# EAGLE board Line sensors - 4 (panel) (EAGLE 9.5.2)
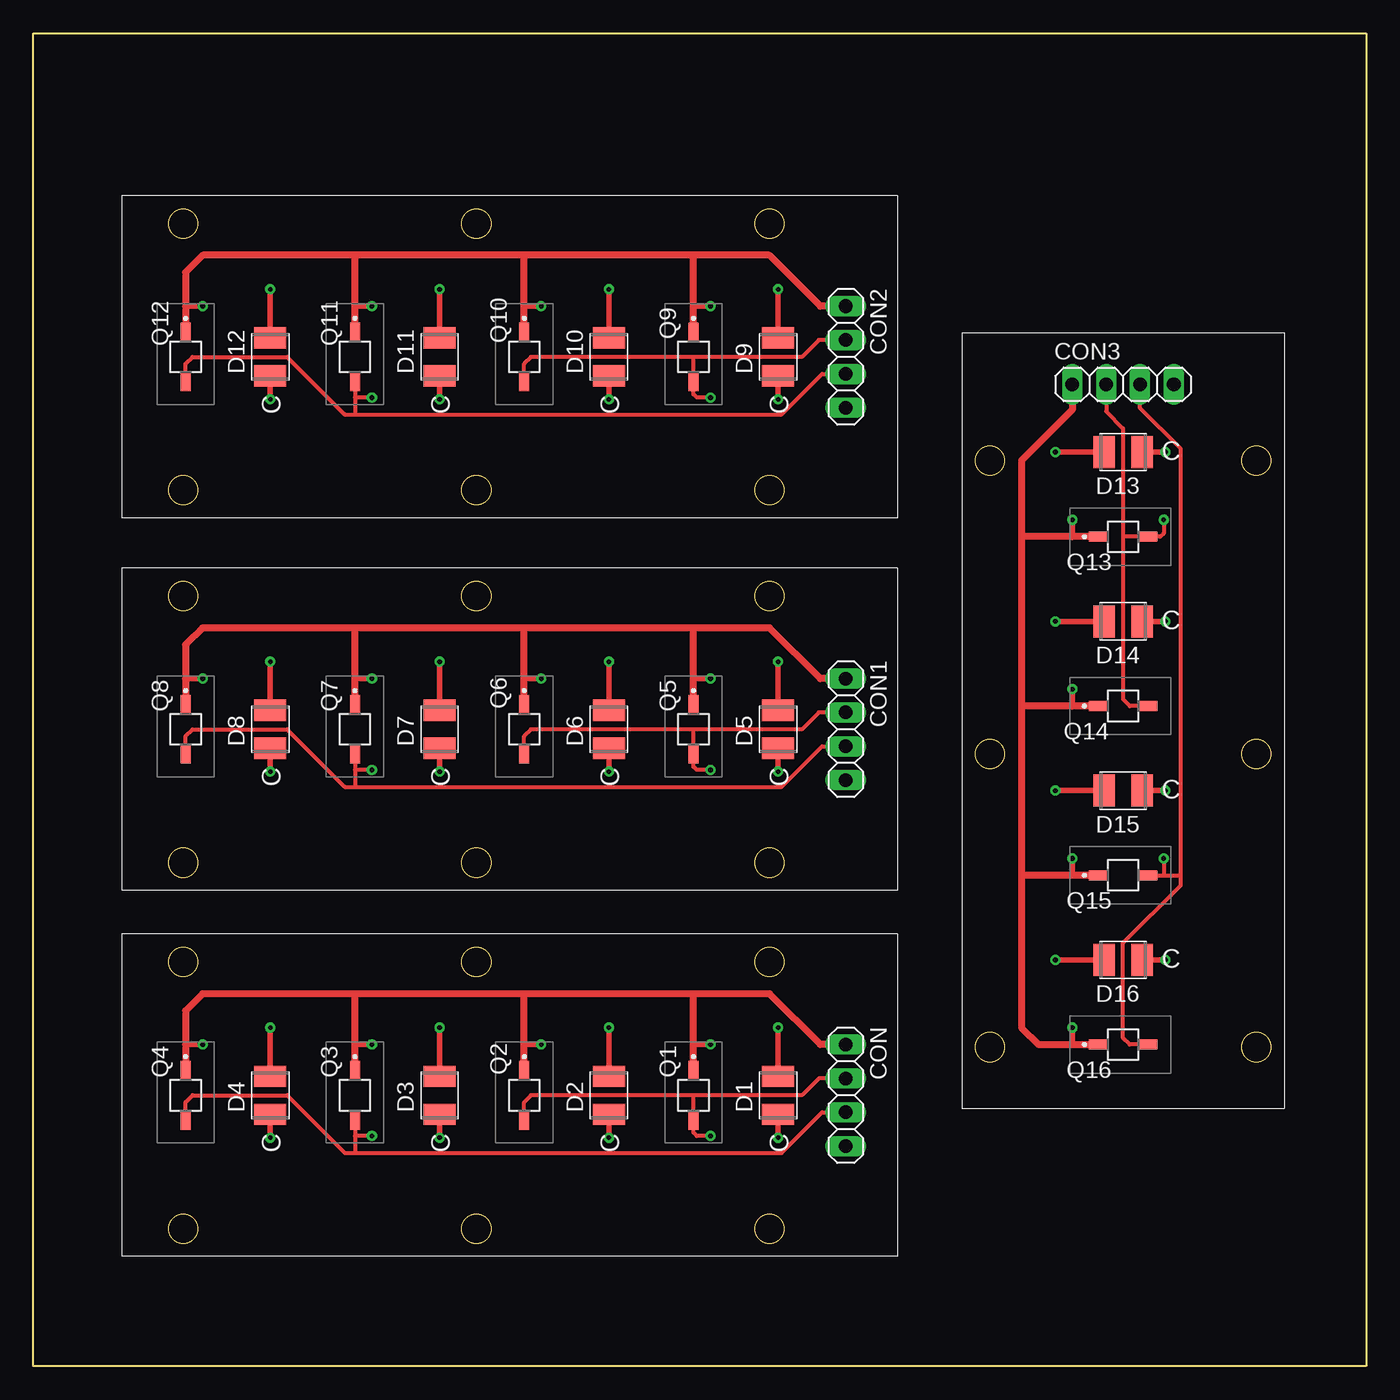
[diagram p0: board, top side]
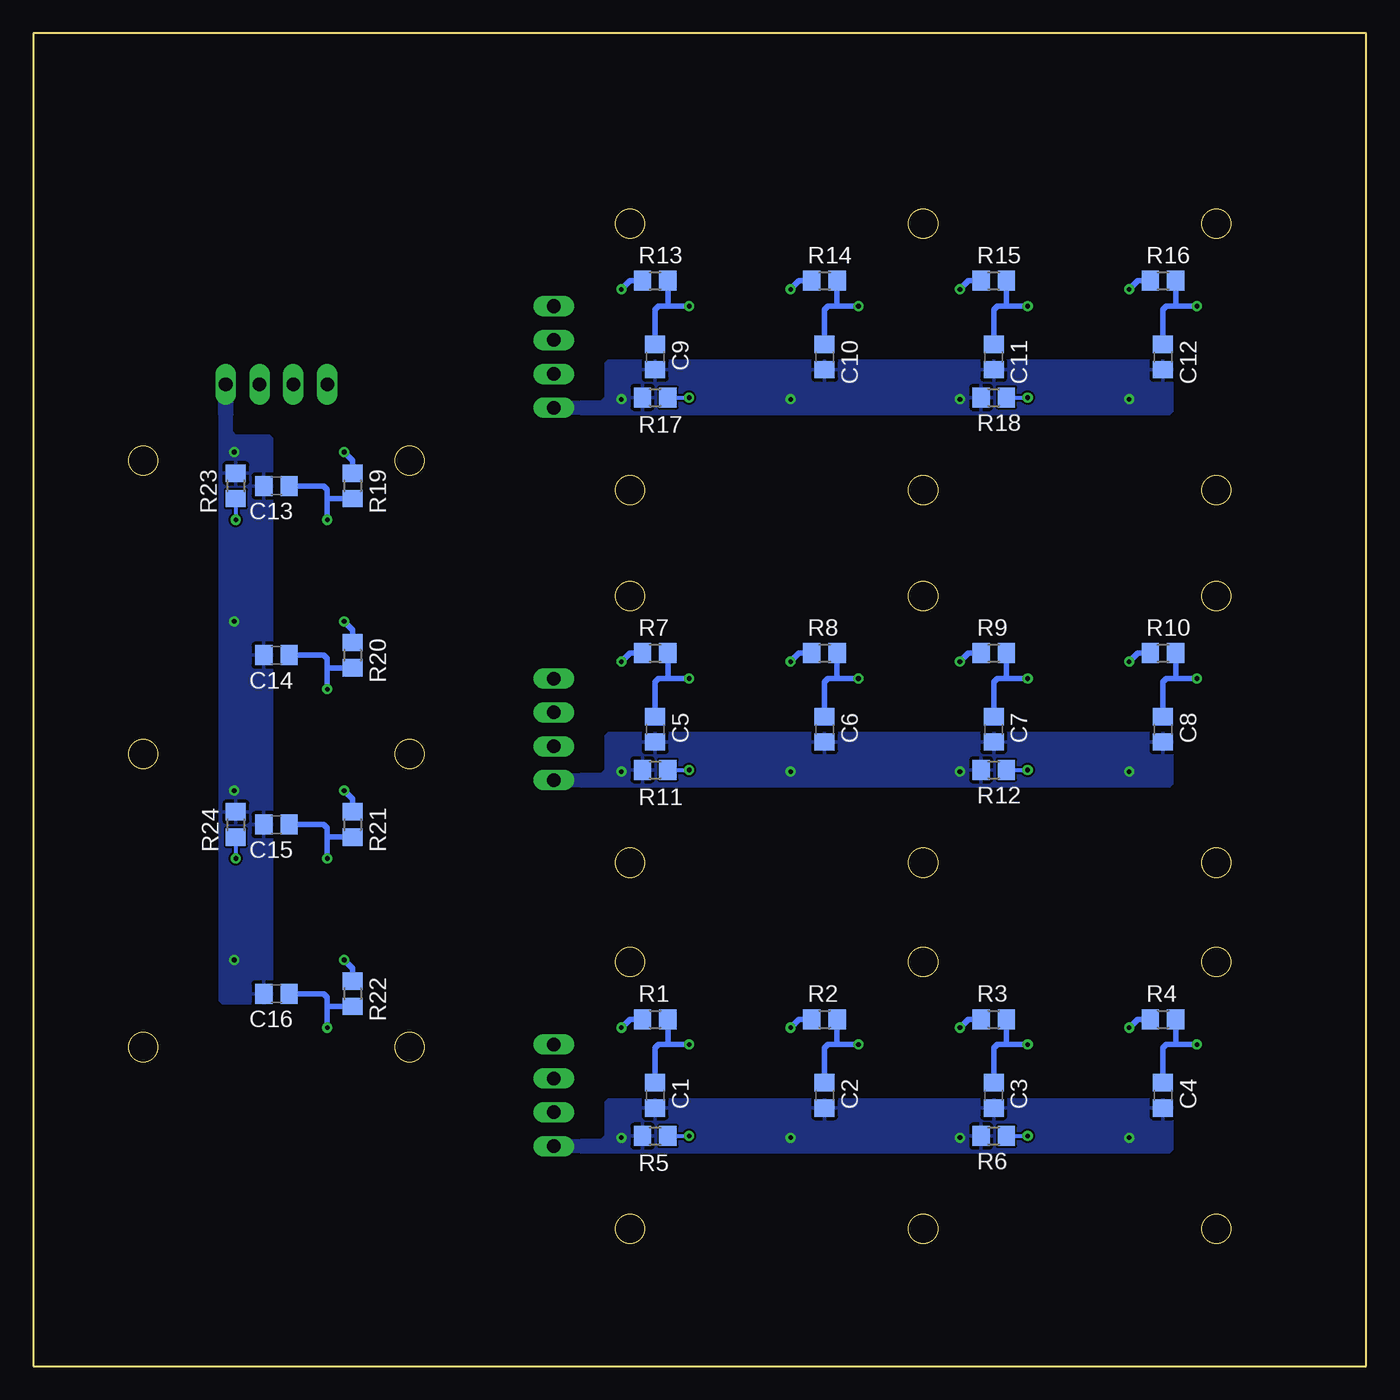
[diagram p1: board, bottom side, seen from below]

Size 100 x 100 mm. Coordinates in mm from the lower left corner, seen from the top.
Outline: 0,0 0,100 100,100 100,0 0,0
Outline: circle at 11.23,10.32 radius 1.1
Outline: circle at 55.23,30.32 radius 1.1
Outline: circle at 33.23,30.32 radius 1.1
Outline: circle at 11.23,30.32 radius 1.1
Outline: circle at 55.23,10.32 radius 1.1
Outline: circle at 33.23,10.32 radius 1.1
Outline: circle at 11.23,37.78 radius 1.1
Outline: circle at 55.23,57.78 radius 1.1
Outline: circle at 33.23,57.78 radius 1.1
Outline: circle at 11.23,57.78 radius 1.1
Outline: circle at 55.23,37.78 radius 1.1
Outline: circle at 33.23,37.78 radius 1.1
Outline: circle at 11.23,65.72 radius 1.1
Outline: circle at 55.23,85.72 radius 1.1
Outline: circle at 33.23,85.72 radius 1.1
Outline: circle at 11.23,85.72 radius 1.1
Outline: circle at 55.23,65.72 radius 1.1
Outline: circle at 33.23,65.72 radius 1.1
Outline: circle at 91.76,23.93 radius 1.1
Outline: circle at 71.76,67.93 radius 1.1
Copper layers (1*16): Top 0.035mm / dielectric 1.5mm / Bottom 0.035mm
Design rules "default": minimum track width 6mil, minimum drill 0.35mm, track to track 6mil, track to pad 6mil, pad to pad 6mil, via to via 6mil, smd to smd 6mil, copper to edge 40mil, drill to drill 6mil, minimum pad ring 10mil, minimum via ring 8mil, stop-mask expansion 4mil, vias tented up to drill 0mil, thermal gap 10mil

## Footprints (pad centres in the part's own frame; a part is rotated, then mirrored left to right if it is on the bottom)
C0805 = smd 1.3 x 1.5: 1 -0.95,0; 2 0.95,0
1X04 = drill 1.016 long: 1 -3.81,0; 2 -1.27,0; 3 1.27,0; 4 3.81,0
3528-2PIN = smd 1.6 x 2.4: 1 -1.425,0; 2 1.425,0
VEMT2520X01 = smd 1.35 x 0.75: 1 -1.9,0; 2 1.9,0
R0805 = smd 1.3 x 1.5: 1 -0.95,0; 2 0.95,0

## Placement (x,y rotation side)
C1  [C0805]  53.34,20.32 270 bottom
C2  [C0805]  40.64,20.32 270 bottom
C3  [C0805]  27.94,20.32 270 bottom
C4  [C0805]  15.24,20.32 270 bottom
C5  [C0805]  53.34,47.78 270 bottom
C6  [C0805]  40.64,47.78 270 bottom
C7  [C0805]  27.94,47.78 270 bottom
C8  [C0805]  15.24,47.78 270 bottom
C9  [C0805]  53.34,75.72 270 bottom
C10  [C0805]  40.64,75.72 270 bottom
C11  [C0805]  27.94,75.72 270 bottom
C12  [C0805]  15.24,75.72 270 bottom
C13  [C0805]  81.76,66.04 180 bottom
C14  [C0805]  81.76,53.34 180 bottom
C15  [C0805]  81.76,40.64 180 bottom
C16  [C0805]  81.76,27.94 180 bottom
CON  [1X04]  60.96,20.32 270 top
CON1  [1X04]  60.96,47.78 270 top
CON2  [1X04]  60.96,75.72 270 top
CON3  [1X04]  81.76,73.66 0 top
D1  [3528-2PIN]  55.88,20.32 90 top
D2  [3528-2PIN]  43.18,20.32 90 top
D3  [3528-2PIN]  30.48,20.32 90 top
D4  [3528-2PIN]  17.78,20.32 90 top
D5  [3528-2PIN]  55.88,47.78 90 top
D6  [3528-2PIN]  43.18,47.78 90 top
D7  [3528-2PIN]  30.48,47.78 90 top
D8  [3528-2PIN]  17.78,47.78 90 top
D9  [3528-2PIN]  55.88,75.72 90 top
D10  [3528-2PIN]  43.18,75.72 90 top
D11  [3528-2PIN]  30.48,75.72 90 top
D12  [3528-2PIN]  17.78,75.72 90 top
D13  [3528-2PIN]  81.76,68.58 180 top
D14  [3528-2PIN]  81.76,55.88 180 top
D15  [3528-2PIN]  81.76,43.18 180 top
D16  [3528-2PIN]  81.76,30.48 180 top
Q1  VEMT2520X01  [VEMT2520X01]  49.53,20.32 270 top
Q2  VEMT2520X01  [VEMT2520X01]  36.83,20.32 270 top
Q3  VEMT2520X01  [VEMT2520X01]  24.13,20.32 270 top
Q4  VEMT2520X01  [VEMT2520X01]  11.43,20.32 270 top
Q5  VEMT2520X01  [VEMT2520X01]  49.53,47.78 270 top
Q6  VEMT2520X01  [VEMT2520X01]  36.83,47.78 270 top
Q7  VEMT2520X01  [VEMT2520X01]  24.13,47.78 270 top
Q8  VEMT2520X01  [VEMT2520X01]  11.43,47.78 270 top
Q9  VEMT2520X01  [VEMT2520X01]  49.53,75.72 270 top
Q10  VEMT2520X01  [VEMT2520X01]  36.83,75.72 270 top
Q11  VEMT2520X01  [VEMT2520X01]  24.13,75.72 270 top
Q12  VEMT2520X01  [VEMT2520X01]  11.43,75.72 270 top
Q13  VEMT2520X01  [VEMT2520X01]  81.76,62.23 0 top
Q14  VEMT2520X01  [VEMT2520X01]  81.76,49.53 0 top
Q15  VEMT2520X01  [VEMT2520X01]  81.76,36.83 0 top
Q16  VEMT2520X01  [VEMT2520X01]  81.76,24.13 0 top
R1  [R0805]  53.34,26.04 0 bottom
R2  [R0805]  40.64,26.04 0 bottom
R3  [R0805]  27.94,26.04 0 bottom
R4  [R0805]  15.24,26.04 0 bottom
R5  [R0805]  53.34,17.27 0 bottom
R6  [R0805]  27.94,17.27 0 bottom
R7  [R0805]  53.34,53.49 0 bottom
R8  [R0805]  40.64,53.49 0 bottom
R9  [R0805]  27.94,53.49 0 bottom
R10  [R0805]  15.24,53.49 0 bottom
R11  [R0805]  53.34,44.73 0 bottom
R12  [R0805]  27.94,44.73 0 bottom
R13  [R0805]  53.34,81.44 0 bottom
R14  [R0805]  40.64,81.44 0 bottom
R15  [R0805]  27.94,81.44 0 bottom
R16  [R0805]  15.24,81.44 0 bottom
R17  [R0805]  53.34,72.67 0 bottom
R18  [R0805]  27.94,72.67 0 bottom
R19  [R0805]  76.05,66.04 270 bottom
R20  [R0805]  76.05,53.34 270 bottom
R21  [R0805]  76.05,40.64 270 bottom
R22  [R0805]  76.05,27.94 270 bottom
R23  [R0805]  84.81,66.04 270 bottom
R24  [R0805]  84.81,40.64 270 bottom

## Library data of the parts
C1-C16 = rcl; SPICEPREFIX: C
CON CON1-CON3 = pinhead
D1-D16 = Wurth_Elektronik_Optoelectronics_rev15b; COMPANY-URL: http://www.we-online.de; CREATED-BY: Christin Otto; CREATED-DATE: APR 2013; DATASHEET-URL: http://katalog.we-online.de/en/led/WL-SMTW?m=t&sq=smtw&sp=&sp=http%3A%2F%2Fwww.we-online.de%2Fweb%2Fen%2Felectronic_components%2Fsearchpage_PBS.php%3Fsearch%3Dsmtw; MANUFACTURER: Würth Elektronik eiSos GmbH
Q1-Q16 = Fototransistor; DESCRIPTION: Vishay VEMT2520X01 +/-15 IR + Visible Light Phototransistor, Surface Mount 2-Pin Reverse Gullwing Package; HEIGHT: 2mm; MANUFACTURER_NAME: Vishay; MANUFACTURER_PART_NUMBER: VEMT2520X01; MOUSER_PART_NUMBER: 782-VEMT2520X01; MOUSER_PRICE-STOCK: https://www.mouser.com/Search/Refine.aspx?Keyword=782-VEMT2520X01; RS_PART_NUMBER: 7689417P; RS_PRICE-STOCK: http://uk.rs-online.com/web/p/products/7689417P
R1-R24 = rcl; SPICEPREFIX: R

## Nets
GND: C1.2 C2.2 C3.2 C4.2 CON.4 D1.1 D2.1 D3.1 D4.1 R5.1 R6.1
GND1: C5.2 C6.2 C7.2 C8.2 CON1.4 D5.1 D6.1 D7.1 D8.1 R11.1 R12.1
GND2: C9.2 C10.2 C11.2 C12.2 CON2.4 D9.1 D10.1 D11.1 D12.1 R17.1 R18.1
GND3: C13.2 C14.2 C15.2 C16.2 CON3.4 D13.1 D14.1 D15.1 D16.1 R23.1 R24.1
N$1: D1.2 R1.1
N$2: D2.2 R2.1
N$3: D3.2 R3.1
N$4: D4.2 R4.1
N$5: D5.2 R7.1
N$6: D6.2 R8.1
N$7: D7.2 R9.1
N$8: D8.2 R10.1
N$9: D9.2 R13.1
N$10: D10.2 R14.1
N$11: D11.2 R15.1
N$12: D12.2 R16.1
N$13: D13.2 R19.1
N$14: D14.2 R20.1
N$15: D15.2 R21.1
N$16: D16.2 R22.1
SIG1: CON.2 Q1.2 Q2.2 R5.2
SIG2: CON.3 Q3.2 Q4.2 R6.2
SIG3: CON1.2 Q5.2 Q6.2 R11.2
SIG4: CON1.3 Q7.2 Q8.2 R12.2
SIG5: CON2.2 Q9.2 Q10.2 R17.2
SIG6: CON2.3 Q11.2 Q12.2 R18.2
SIG7: CON3.2 Q13.2 Q14.2 R23.2
SIG8: CON3.3 Q15.2 Q16.2 R24.2
V+: C1.1 C2.1 C3.1 C4.1 CON.1 Q1.1 Q2.1 Q3.1 Q4.1 R1.2 R2.2 R3.2 R4.2
V+1: C5.1 C6.1 C7.1 C8.1 CON1.1 Q5.1 Q6.1 Q7.1 Q8.1 R7.2 R8.2 R9.2 R10.2
V+2: C9.1 C10.1 C11.1 C12.1 CON2.1 Q9.1 Q10.1 Q11.1 Q12.1 R13.2 R14.2 R15.2 R16.2
V+3: C13.1 C14.1 C15.1 C16.1 CON3.1 Q13.1 Q14.1 Q15.1 Q16.1 R19.2 R20.2 R21.2 R22.2

## Tracks (layer width: path | path; a pad name or v marks a point on that pad's centre or on a via)
GND  (via drill 0.35)
  Top 0.406: D4.1 v17.78,17.14 | D3.1 v30.48,17.14 | D2.1 v43.18,17.14 | D1.1 v55.88,17.14
  pour Bottom: 14.48,20.07 56.9,20.07 57.15,19.81 57.15,17.27 57.4,17.02 58.93,17.02 58.93,16 14.73,16 14.48,16.26
  pour Bottom (no thermals): 60.96,17.02 58.67,17.02 58.67,16 60.96,16
GND1  (via drill 0.35)
  Top 0.406: D8.1 v17.78,44.6 | D7.1 v30.48,44.6 | D6.1 v43.18,44.6 | D5.1 v55.88,44.6
  pour Bottom: 14.48,47.53 56.9,47.53 57.15,47.27 57.15,44.73 57.4,44.48 58.93,44.48 58.93,43.46 14.73,43.46 14.48,43.72
  pour Bottom (no thermals): 60.96,44.48 58.67,44.48 58.67,43.46 60.96,43.46
GND2  (via drill 0.35)
  Top 0.406: D12.1 v17.78,72.55 | D11.1 v30.48,72.55 | D10.1 v43.18,72.55 | D9.1 v55.88,72.55
  pour Bottom: 14.48,75.47 56.9,75.47 57.15,75.21 57.15,72.67 57.4,72.42 58.93,72.42 58.93,71.4 14.73,71.4 14.48,71.66
  pour Bottom (no thermals): 60.96,72.42 58.67,72.42 58.67,71.4 60.96,71.4
GND3  (via drill 0.35)
  Top 0.406: D16.1 v84.94,30.48 | D15.1 v84.94,43.18 | D14.1 v84.94,55.88 | D13.1 v84.94,68.58
  pour Bottom: 82.01,27.18 82.01,69.6 82.27,69.85 84.81,69.85 85.06,70.1 85.06,71.63 86.08,71.63 86.08,27.43 85.82,27.18
  pour Bottom (no thermals): 85.06,73.66 85.06,71.37 86.08,71.37 86.08,73.66
N$1  (via drill 0.35)
  Top 0.406: v55.88,25.4 D1.2
  Bottom 0.406: R1.1 55.24,26.04 v55.88,25.4
N$2  (via drill 0.35)
  Top 0.406: v43.18,25.4 D2.2
  Bottom 0.406: R2.1 42.55,26.04 v43.18,25.4
N$3  (via drill 0.35)
  Top 0.406: v30.48,25.4 D3.2
  Bottom 0.406: R3.1 29.84,26.04 v30.48,25.4
N$4  (via drill 0.35)
  Top 0.406: v17.78,25.4 D4.2
  Bottom 0.406: R4.1 17.14,26.04 v17.78,25.4
N$5  (via drill 0.35)
  Top 0.406: v55.88,52.86 D5.2
  Bottom 0.406: R7.1 55.24,53.49 v55.88,52.86
N$6  (via drill 0.35)
  Top 0.406: v43.18,52.86 D6.2
  Bottom 0.406: R8.1 42.55,53.49 v43.18,52.86
N$7  (via drill 0.35)
  Top 0.406: v30.48,52.86 D7.2
  Bottom 0.406: R9.1 29.84,53.49 v30.48,52.86
N$8  (via drill 0.35)
  Top 0.406: v17.78,52.86 D8.2
  Bottom 0.406: R10.1 17.14,53.49 v17.78,52.86
N$9  (via drill 0.35)
  Top 0.406: v55.88,80.8 D9.2
  Bottom 0.406: R13.1 55.24,81.44 v55.88,80.8
N$10  (via drill 0.35)
  Top 0.406: v43.18,80.8 D10.2
  Bottom 0.406: R14.1 42.55,81.44 v43.18,80.8
N$11  (via drill 0.35)
  Top 0.406: v30.48,80.8 D11.2
  Bottom 0.406: R15.1 29.84,81.44 v30.48,80.8
N$12  (via drill 0.35)
  Top 0.406: v17.78,80.8 D12.2
  Bottom 0.406: R16.1 17.14,81.44 v17.78,80.8
N$13  (via drill 0.35)
  Top 0.406: v76.68,68.58 D13.2
  Bottom 0.406: R19.1 76.05,67.94 v76.68,68.58
N$14  (via drill 0.35)
  Top 0.406: v76.68,55.88 D14.2
  Bottom 0.406: R20.1 76.05,55.24 v76.68,55.88
N$15  (via drill 0.35)
  Top 0.406: v76.68,43.18 D15.2
  Bottom 0.406: R21.1 76.05,42.55 v76.68,43.18
N$16  (via drill 0.35)
  Top 0.406: v76.68,30.48 D16.2
  Bottom 0.406: R22.1 76.05,29.84 v76.68,30.48
SIG1  (via drill 0.35)
  Top 0.305: Q2.2 36.83,19.81 37.34,20.32 49.53,20.32 | CON.2 58.93,21.59 57.66,20.32 49.53,20.32 | 49.53,20.32 Q1.2 49.53,17.53 49.78,17.27 v50.8,17.27
  Bottom 0.305: R5.2 v50.8,17.27
SIG2  (via drill 0.35)
  Top 0.305: Q4.2 11.43,19.81 11.94,20.32 19.05,20.32 23.37,16 24.13,16 | Q3.2 24.13,17.27 | 24.13,17.27 24.13,16 | v25.4,17.27 24.13,17.27 | CON.3 59.18,19.05 56.13,16 24.13,16
  Bottom 0.305: R6.2 v25.4,17.27
SIG3  (via drill 0.35)
  Top 0.305: Q6.2 36.83,47.27 37.34,47.78 49.53,47.78 | CON1.2 58.93,49.05 57.66,47.78 49.53,47.78 | 49.53,47.78 Q5.2 49.53,44.99 49.78,44.73 v50.8,44.73
  Bottom 0.305: R11.2 v50.8,44.73
SIG4  (via drill 0.35)
  Top 0.305: Q8.2 11.43,47.27 11.94,47.78 19.05,47.78 23.37,43.46 24.13,43.46 | Q7.2 24.13,44.73 | 24.13,44.73 24.13,43.46 | v25.4,44.73 24.13,44.73 | CON1.3 59.18,46.51 56.13,43.46 24.13,43.46
  Bottom 0.305: R12.2 v25.4,44.73
SIG5  (via drill 0.35)
  Top 0.305: Q10.2 36.83,75.21 37.34,75.72 49.53,75.72 | CON2.2 58.93,76.99 57.66,75.72 49.53,75.72 | 49.53,75.72 Q9.2 49.53,72.93 49.78,72.67 v50.8,72.67
  Bottom 0.305: R17.2 v50.8,72.67
SIG6  (via drill 0.35)
  Top 0.305: Q12.2 11.43,75.21 11.94,75.72 19.05,75.72 23.37,71.4 24.13,71.4 | Q11.2 24.13,72.67 | 24.13,72.67 24.13,71.4 | v25.4,72.67 24.13,72.67 | CON2.3 59.18,74.45 56.13,71.4 24.13,71.4
  Bottom 0.305: R18.2 v25.4,72.67
SIG7  (via drill 0.35)
  Top 0.305: Q14.2 82.27,49.53 81.76,50.04 81.76,62.23 | CON3.2 80.49,71.63 81.76,70.36 81.76,62.23 | 81.76,62.23 Q13.2 84.55,62.23 84.81,62.48 v84.81,63.5
  Bottom 0.305: R23.2 v84.81,63.5
SIG8  (via drill 0.35)
  Top 0.305: Q16.2 82.27,24.13 81.76,24.64 81.76,31.75 86.08,36.07 86.08,36.83 | Q15.2 84.81,36.83 | 84.81,36.83 86.08,36.83 | v84.81,38.1 84.81,36.83 | CON3.3 83.03,71.88 86.08,68.83 86.08,36.83
  Bottom 0.305: R24.2 v84.81,38.1
V+  (via drill 0.35)
  Top 0.406: 11.43,24.13 v12.7,24.13 | 24.13,24.13 v25.4,24.13 | 36.83,24.13 v38.1,24.13 | 49.53,24.13 v50.8,24.13
  Top 0.508: CON.1 59.05,24.13 55.24,27.94 49.53,27.94 | 49.53,27.94 36.83,27.94 | 36.83,27.94 24.13,27.94 | 24.13,27.94 12.7,27.94 11.43,26.67 11.43,24.13 Q4.1 | Q3.1 24.13,24.13 24.13,27.94 | Q2.1 36.83,24.13 36.83,27.94 | Q1.1 49.53,24.13 49.53,27.94
  Bottom 0.406: v12.7,24.13 14.22,24.13 | 14.22,24.13 14.99,24.13 15.24,23.88 C4.1 | R4.2 14.29,24.2 14.22,24.13 | v25.4,24.13 26.92,24.13 | 26.92,24.13 27.69,24.13 27.94,23.88 C3.1 | R3.2 26.99,24.2 26.92,24.13 | v38.1,24.13 39.62,24.13 | 39.62,24.13 40.39,24.13 40.64,23.88 C2.1 | R2.2 39.69,24.2 39.62,24.13 | v50.8,24.13 52.32,24.13 | 52.32,24.13 53.09,24.13 53.34,23.88 C1.1 | R1.2 52.39,24.2 52.32,24.13
V+1  (via drill 0.35)
  Top 0.406: 11.43,51.59 v12.7,51.59 | 24.13,51.59 v25.4,51.59 | 36.83,51.59 v38.1,51.59 | 49.53,51.59 v50.8,51.59
  Top 0.508: CON1.1 59.05,51.59 55.24,55.4 49.53,55.4 | 49.53,55.4 36.83,55.4 | 36.83,55.4 24.13,55.4 | 24.13,55.4 12.7,55.4 11.43,54.13 11.43,51.59 Q8.1 | Q7.1 24.13,51.59 24.13,55.4 | Q6.1 36.83,51.59 36.83,55.4 | Q5.1 49.53,51.59 49.53,55.4
  Bottom 0.406: v12.7,51.59 14.22,51.59 | 14.22,51.59 14.99,51.59 15.24,51.34 C8.1 | R10.2 14.29,51.66 14.22,51.59 | v25.4,51.59 26.92,51.59 | 26.92,51.59 27.69,51.59 27.94,51.34 C7.1 | R9.2 26.99,51.66 26.92,51.59 | v38.1,51.59 39.62,51.59 | 39.62,51.59 40.39,51.59 40.64,51.34 C6.1 | R8.2 39.69,51.66 39.62,51.59 | v50.8,51.59 52.32,51.59 | 52.32,51.59 53.09,51.59 53.34,51.34 C5.1 | R7.2 52.39,51.66 52.32,51.59
V+2  (via drill 0.35)
  Top 0.406: 11.43,79.53 v12.7,79.53 | 24.13,79.53 v25.4,79.53 | 36.83,79.53 v38.1,79.53 | 49.53,79.53 v50.8,79.53
  Top 0.508: CON2.1 59.05,79.53 55.24,83.34 49.53,83.34 | 49.53,83.34 36.83,83.34 | 36.83,83.34 24.13,83.34 | 24.13,83.34 12.7,83.34 11.43,82.07 11.43,79.53 Q12.1 | Q11.1 24.13,79.53 24.13,83.34 | Q10.1 36.83,79.53 36.83,83.34 | Q9.1 49.53,79.53 49.53,83.34
  Bottom 0.406: v12.7,79.53 14.22,79.53 | 14.22,79.53 14.99,79.53 15.24,79.28 C12.1 | R16.2 14.29,79.6 14.22,79.53 | v25.4,79.53 26.92,79.53 | 26.92,79.53 27.69,79.53 27.94,79.28 C11.1 | R15.2 26.99,79.6 26.92,79.53 | v38.1,79.53 39.62,79.53 | 39.62,79.53 40.39,79.53 40.64,79.28 C10.1 | R14.2 39.69,79.6 39.62,79.53 | v50.8,79.53 52.32,79.53 | 52.32,79.53 53.09,79.53 53.34,79.28 C9.1 | R13.2 52.39,79.6 52.32,79.53
V+3  (via drill 0.35)
  Top 0.406: 77.95,24.13 v77.95,25.4 | 77.95,36.83 v77.95,38.1 | 77.95,49.53 v77.95,50.8 | 77.95,62.23 v77.95,63.5
  Top 0.508: CON3.1 77.95,71.75 74.14,67.94 74.14,62.23 | 74.14,62.23 74.14,49.53 | 74.14,49.53 74.14,36.83 | 74.14,36.83 74.14,25.4 75.41,24.13 77.95,24.13 Q16.1 | Q15.1 77.95,36.83 74.14,36.83 | Q14.1 77.95,49.53 74.14,49.53 | Q13.1 77.95,62.23 74.14,62.23
  Bottom 0.406: v77.95,25.4 77.95,26.92 | 77.95,26.92 77.95,27.69 78.2,27.94 C16.1 | R22.2 77.88,26.99 77.95,26.92 | v77.95,38.1 77.95,39.62 | 77.95,39.62 77.95,40.39 78.2,40.64 C15.1 | R21.2 77.88,39.69 77.95,39.62 | v77.95,50.8 77.95,52.32 | 77.95,52.32 77.95,53.09 78.2,53.34 C14.1 | R20.2 77.88,52.39 77.95,52.32 | v77.95,63.5 77.95,65.02 | 77.95,65.02 77.95,65.79 78.2,66.04 C13.1 | R19.2 77.88,65.09 77.95,65.02